# Altium PCB analog_ECG_PCB_v1.PcbDoc
Units mil, origin at the board's own origin, x right, y up, seen from the top; angles counter-clockwise.
Board outline 3049.21 x 2309.06 mil, 2 copper layers (Top Layer, Bottom Layer), stack 21 mil thick; 42 components, 34 nets, 130 pads, 0 vias.
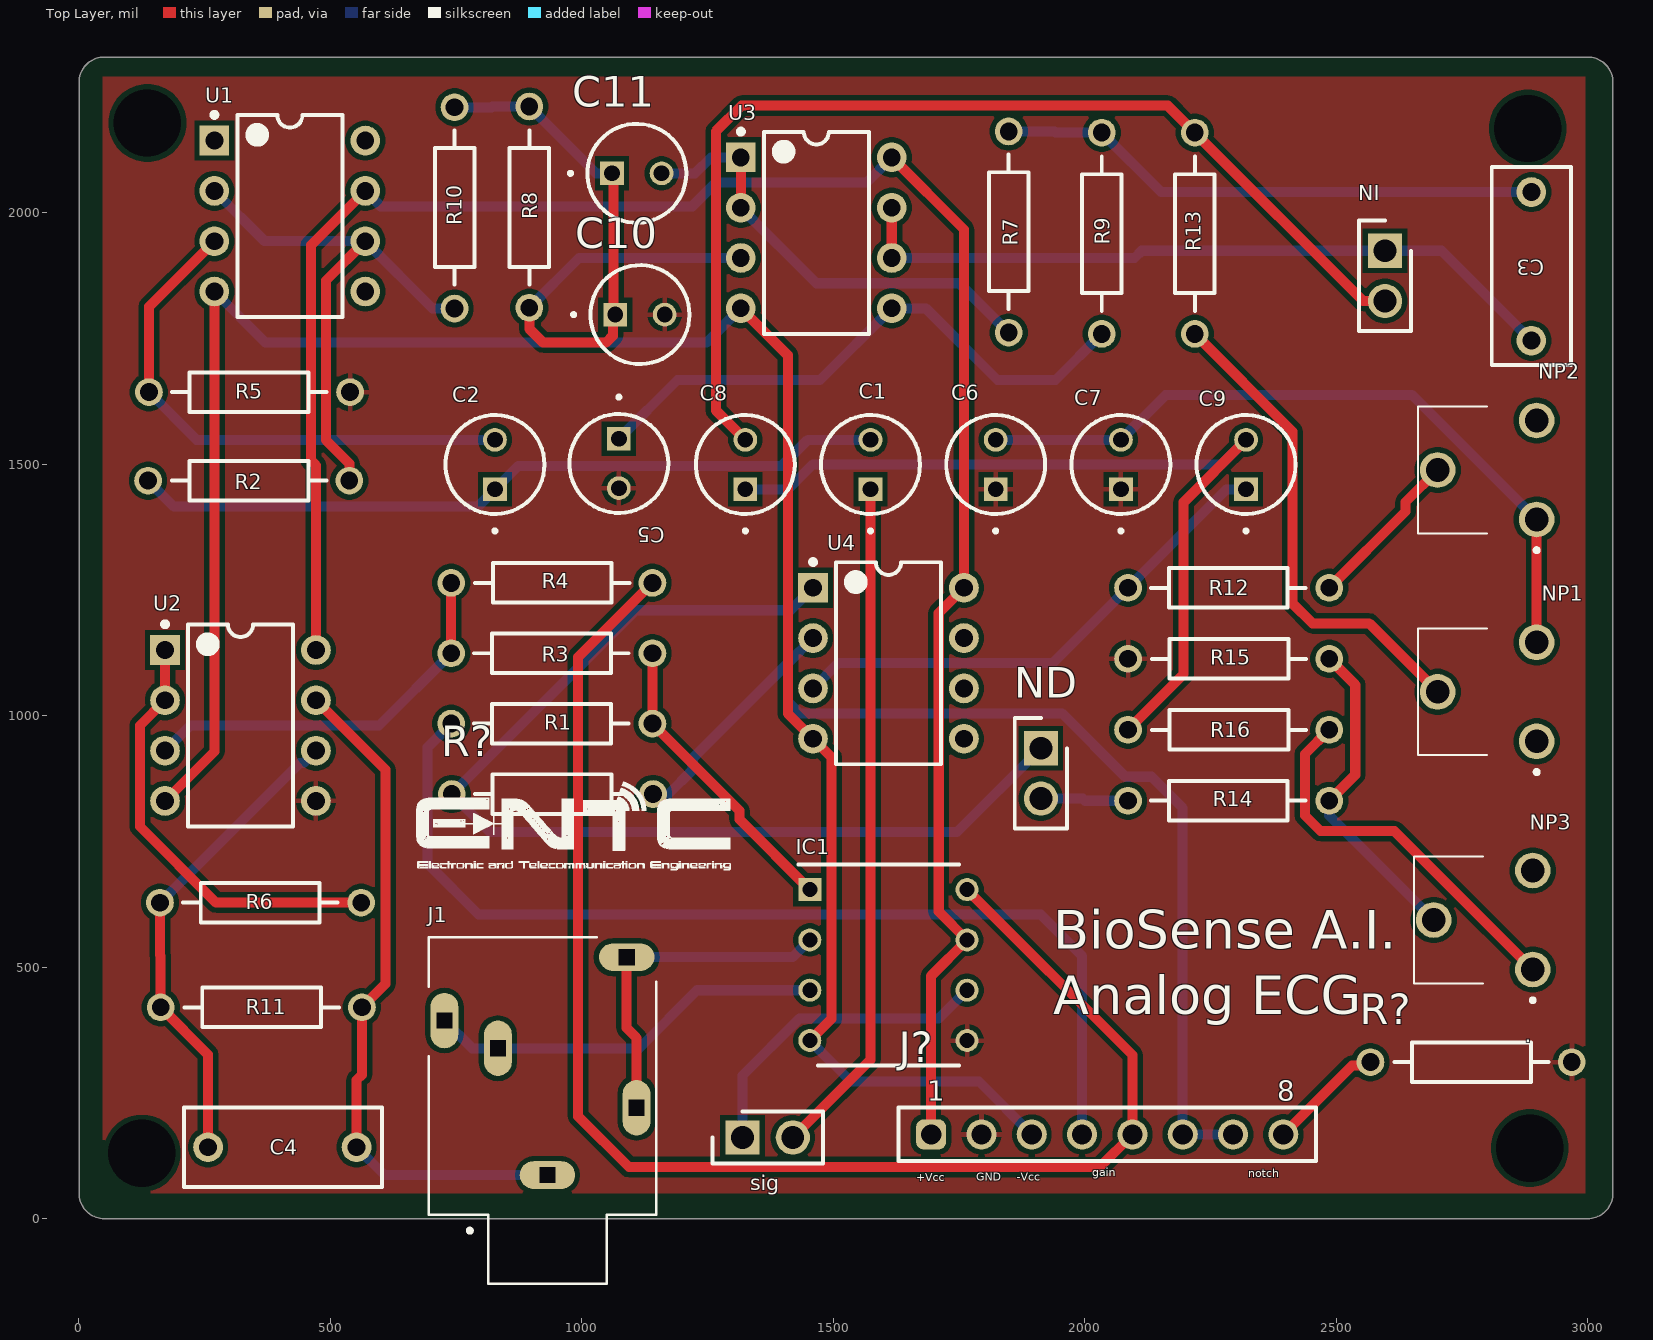
[diagram p0: Top Layer view]
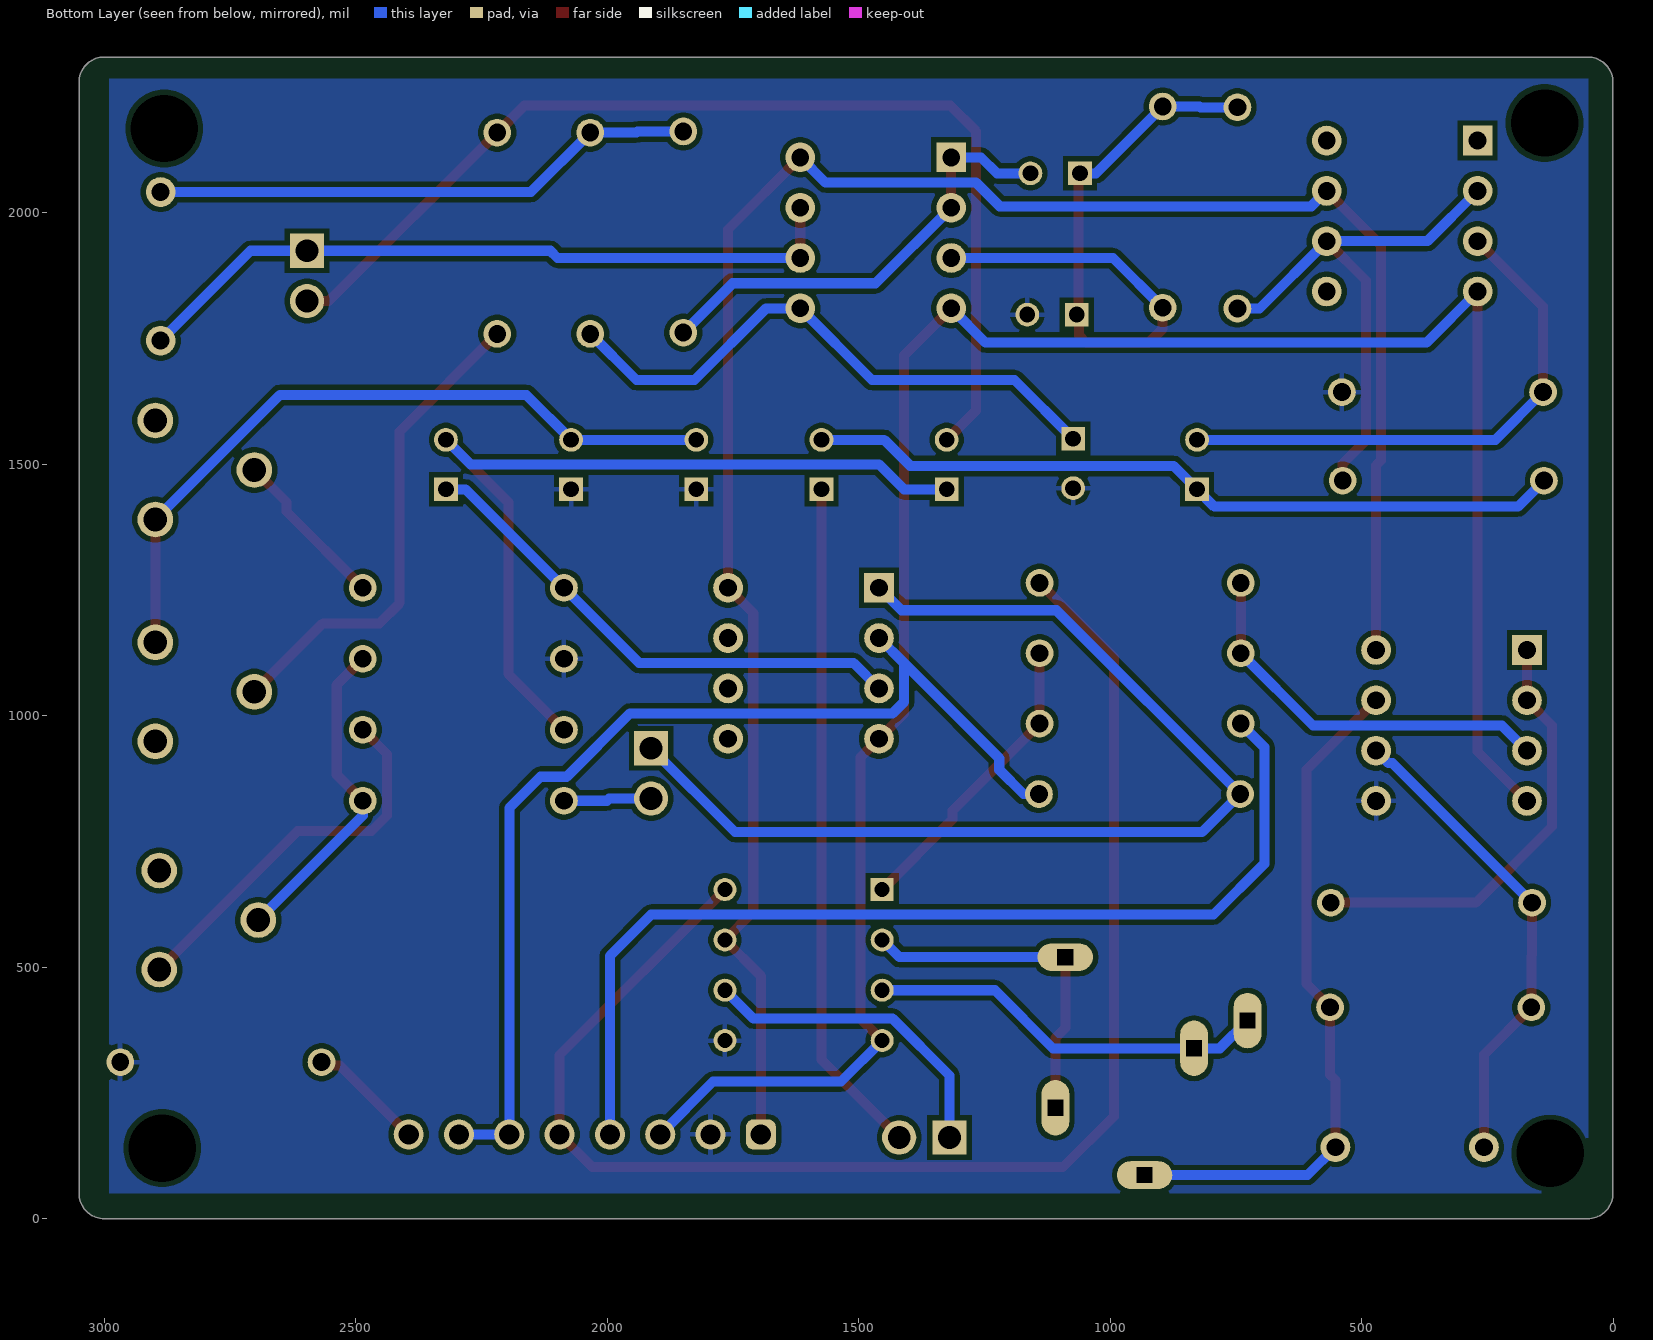
[diagram p1: Bottom Layer view, seen from below]
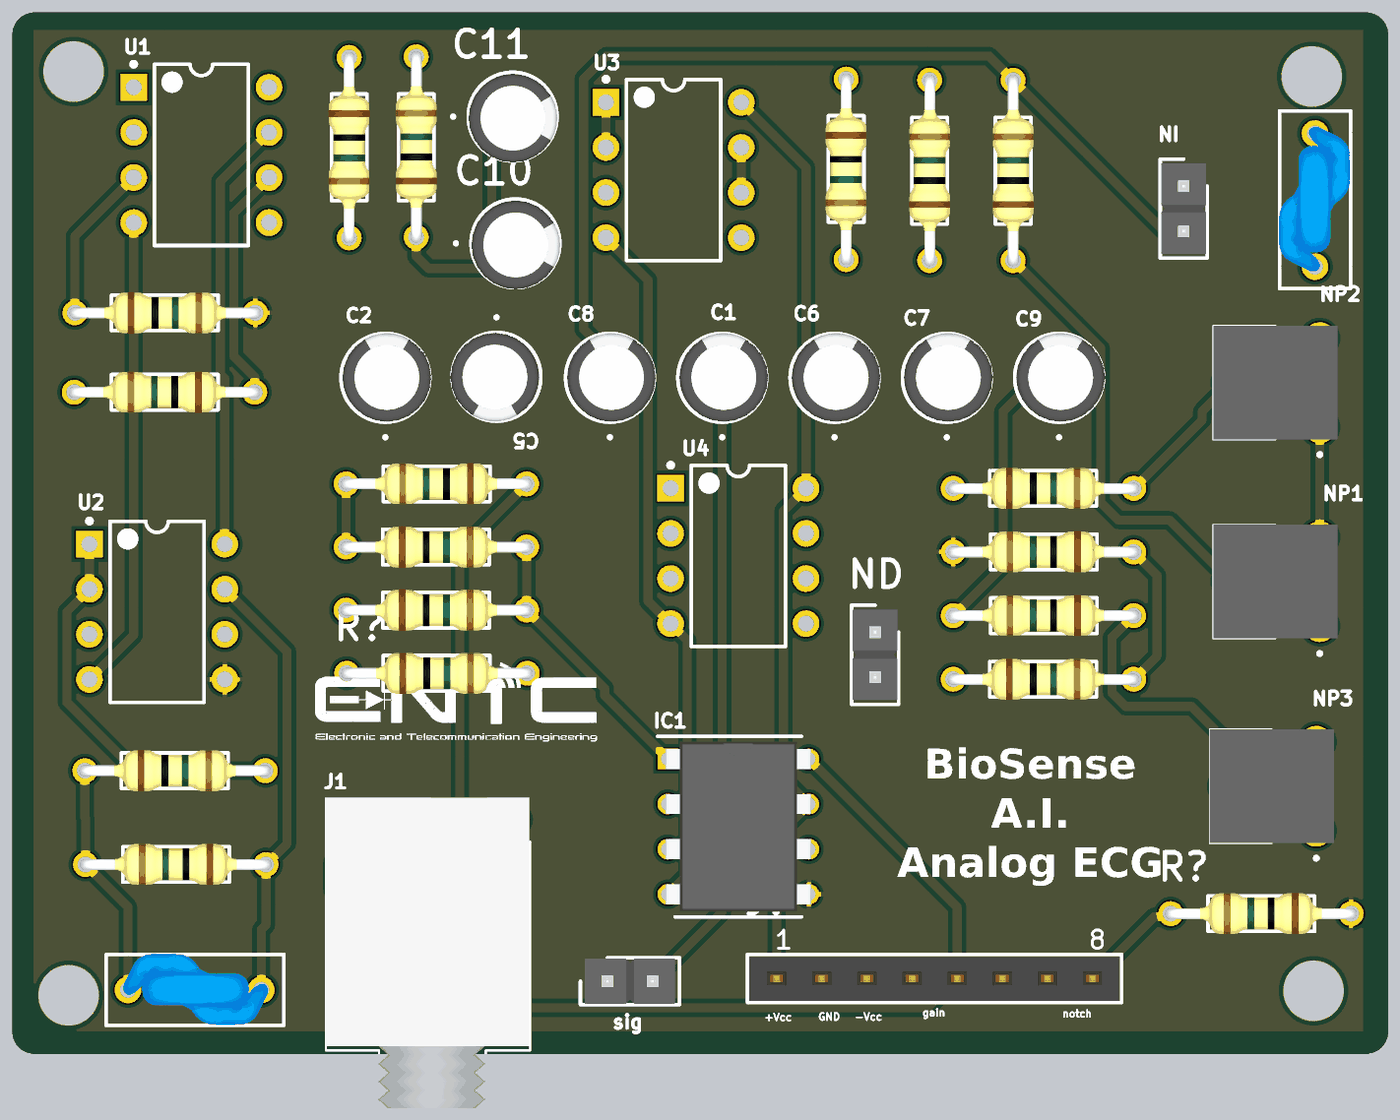
[diagram p2: 3D render of the assembled board from above, using the file's embedded part models]

## Layer stack, top to bottom
Top Solder: solder mask 0.4, Solder Resist, Dk 3.5
Top Layer: signal copper 1.4
Dielectric 2: prepreg 2.8, PP-006, Dk 4.1
Dielectric 1: dielectric 12.6, FR-4, Dk 4.8
Dielectric 3: prepreg 2.8, PP-006, Dk 4.1
Bottom Layer: signal copper 1.4
Bottom Solder: solder mask 0.4, Solder Resist, Dk 3.5

## Board outline
50.98,0 cw(c50.98,50) 0.98,50 0.98,2259.06 cw(c50.98,2259.06) 50.98,2309.06 3000.2,2309.06 cw(c3000.2,2259.06) 3050.2,2259.06 3050.2,50 cw(c3000.2,50) 3000.2,0

## Design rules (kind name [scope] priority, off if disabled: settings)
Clearance [All] p1: gap=10 ignorepadtopadclearanceinfootprint=FALSE except(0: Arc-Hole Track-Hole SMDPad-Hole THPad-Hole Via-Hole Fill-Hole Poly-Hole Region-Hole Text-Hole)
PolygonConnect [All] p1: connectstyle=Relief reliefconductorwidth=10 reliefentries=4 polygonreliefangle="90 Angle" airgapwidth=10
RoutingVias [All] p1: holewidth=28 width=50 viastyle="Through Hole" minholewidth=28 minwidth=50 maxholewidth=28 maxwidth=50
SolderMaskExpansion [All] p1: expansion=4 istentingtop=FALSE
Width [All] p1: maxlimit=30 minlimit=10 preferedwidth=20 minimp=50.000000 maximp=50.000000 favimp=50.000000
30 further rules are at their usual default settings.

## Components (designator, comment, footprint, x,y, rotation, side; value= is the part's Value field where it differs from the comment)
C1 "capacitor 15uF" Capacitor10uF 1574.31,1499.02 r90 top value=15uF
C2 "capacitor 15uF" Capacitor10uF 827.76,1499.02 r90 top value=15uF
C3 "0.68uF" "Capacitor - duplicate" 2888,1894 r270 top
C4 "0.68uF" "Capacitor - duplicate" 406,142 r180 top
C5 "capacitor 0.1uF" Capacitor10uF 1074,1501.21 r270 top value=0.1uF
C6 "0.1uF" Capacitor10uF 1823.16,1499.02 r90 top
C7 "0.1uF" Capacitor10uF 2072.01,1499.02 r90 top
C8 "capacitor 0.1uF" Capacitor10uF 1325.46,1499.02 r90 top value=0.1uF
C9 "capacitor 0.1uF" Capacitor10uF 2320.87,1499.02 r90 top value=0.1uF
C10 "0.1uF" Capacitor10uF 1116,1797 r0 top
C11 "0.1uF" Capacitor10uF 1109.79,2078 r0 top
IC1 "AD620BN" DIP794W56P254L959H533Q8N 1610,504 r0 top
J1 "3.5mm header" SWITCHCRAFT_35RAPC4BH3 922.24,214.57 r90 top
J? "61300811821" 61300811821 2044.94,167.32 r0 top
ND "2pinheader" HDRV2W66P0X254_1X2_508X254X874P 1913,935 r270 top
NI "2pinheader" HDRV2W66P0X254_1X2_508X254X874P 2597,1924 r270 top
NP1 "semifixedpots" VRRM065 2898.62,948.82 r90 top
NP2 "semifixedpots" VRRM065 2898.62,1389.76 r90 top
NP3 "semifixedpots" VRRM065 2890.78,495.08 r90 top
R1 "resistor 50ohm" "Axial 0.4" 939.96,983.94 r180 top value=10kR
R2 "resistor 8k" "Axial 0.4" 339,1467 r0 top value=10kR
R3 "resistor 33k" "Axial 0.4" 939.96,1123.89 r180 top value=10kR
R4 "resistor 33k" "Axial 0.4" 941.54,1263.78 r0 top value=10kR
R5 "R 16k" "Axial 0.4" 339,1643 r180 top value=10kR
R6 "R 12k" "Axial 0.4" 361,628 r180 top value=10kR
R7 "R 6.2k" "Axial 0.4" 1849,1962 r90 top value=10kR
R8 "R 15k" "Axial 0.4" 896,2010 r270 top value=10kR
R9 "R 6.2k" "Axial 0.4" 2034,1958 r270 top value=10kR
R10 "R 15k" "Axial 0.4" 747.52,2010 r90 top value=10kR
R11 "R 1M" "Axial 0.4" 364,420 r0 top value=10kR
R12 "R 32k" "Axial 0.4" 2285.43,1253.94 r180 top value=10kR
R13 "R 32k" "Axial 0.4" 2219,1958 r270 top value=10kR
R14 "resistor 1k" "Axial 0.4" 2285.43,830.71 r180 top value=10kR
R15 "resistor 20k" "Axial 0.4" 2287.01,1112.81 r0 top value=10kR
R16 "R 16k" "Axial 0.4" 2287.01,971.74 r0 top value=10kR
R? "R 100k" "Axial 0.4" 2769,311 r0 top value=10kR
R? "R 100k" "Axial 0.4" 941.21,844 r180 top value=10kR
sig "sig" HDRV2W66P0X254_1X2_508X254X874P 1319.88,161.22 r0 top
U1 "TL071CP" P0008A 420,1993 r0 top
U2 "TL072CP" P0008A 321.85,980.31 r0 top
U3 "TL072CP" P0008A 1466.54,1959.65 r0 top
U4 "TL072CP" P0008A 1610,1104 r0 top

## Footprints (in the part's own frame and the unit in brackets; to place one, negate y for a bottom-side part, rotate by r counter-clockwise, add the part's x,y. Pads: shape width x height; smd on the part's side, far side on the other; paste and mask are expansions set on the pad)
61300811821 [mm] "Socket Header, Pitch 2.54 mm, THT, Vertical, single row, 8p"
  rrect50% 1.52x1.52 hole 1.02: 1(-8.89,0)
  round 1.52 hole 1.02: 2(-6.35,0) 3(-3.81,0) 4(-1.27,0) 5(1.27,0) 6(3.81,0) 7(6.35,0) 8(8.89,0)
  silkscreen extent -10.54,-1.35 10.54,1.35, body extent -10.41,-1.25 10.41,1.25, height 8.55
"Axial 0.4" [mm]
  round 1.4 hole 0.9: 1(-5.1,0) 2(5.06,0)
  silkscreen extent -3.9,-1 3.9,1, body extent -5.4,-1.16 5.36,1.17, height 2.09
Capacitor10uF [mm]
  round 1.2 hole 0.8: N(1.25,0)
  rect 1.2x1.2 hole 0.8: P(-1.25,0)
  silkscreen extent -3.4,-2.5 2.5,2.5, body extent -2.47,-2.59 2.52,2.41, height 12
"Capacitor - duplicate" [mm]
  round 1.5 hole 0.9: 1(-3.725,0) 2(3.775,0)
  silkscreen extent -5,-2 5,2, body extent -4.1,-2.03 4.04,1.97, height 10.98
DIP794W56P254L959H533Q8N [mm]
  rect 1.16x1.16 hole 0.76: 1(-3.97,3.81)
  round 1.16 hole 0.76: 2(-3.97,1.27) 3(-3.97,-1.27) 4(-3.97,-3.81) 5(3.97,-3.81) 6(3.97,-1.27) 7(3.97,1.27) 8(3.97,3.81)
  silkscreen extent -4.55,-5.08 3.56,5.08, body extent -4.11,-4.79 4.11,4.79, height 5.33
HDRV2W66P0X254_1X2_508X254X874P [mm]
  rect 1.725x1.725 / inner round 1.725 / far side rect 1.725x1.725 hole 1.15: 1(0,0)
  round 1.725 hole 1.15: 2(2.54,0)
  silkscreen extent -1.52,-1.32 4.06,1.32, body extent -1.27,-1.27 3.81,1.27, height 8.74
P0008A [mm] "DIP, 8-Leads, Body 10.15x6.6mm, Pitch 2.54mm"
  rect 1.5x1.5 hole 0.9: 1(-3.81,3.81)
  round 1.5 hole 0.9: 2(-3.81,1.27) 3(-3.81,-1.27) 4(-3.81,-3.81) 5(3.81,-3.81) 6(3.81,-1.27) 7(3.81,1.27) 8(3.81,3.81)
  silkscreen extent -3.93,-5.1 2.65,5.23, body extent -3.95,-5.07 3.95,5.07, height 5.08
SWITCHCRAFT_35RAPC4BH3 [mm]
  oval 1.4x2.8 hole 0.8 square: 1(-3.25,-0.25) 4(7.75,-4.25)
  oval 2.8x1.4 hole 0.8 square: 2(4.55,4.95) 3(3.15,2.25) 5(0.15,-4.75)
  silkscreen extent -8.75,-5.75 8.75,5.75, body extent -8.51,-5.71 8.99,5.79, height 6.5
VRRM065 [mm]
  round 1.8 hole 1.2: 1(0,0) 2(2.5,5) 3(5,0)
  silkscreen extent -1.6,-0.05 5.7,6, body extent -0.7,-1 5.7,6, height 7.6

## Part data
C1 C2: library part "ECA-1HM100I (2)", "Aluminum Electrolytic Capacitor, Polarized, Aluminum (wet), 50V, 20% +Tol, 20% -Tol, 10uF, Through Hole Mount", Capacitor Type=Aluminium, Leakage Current=5uA, Manufacturer=Panasonic, Manufacturer Part Number=ECA-1HM100I, Max Operating Temperature=85°C, Min Operating Temperature=-40°C, Package Shape=Cylindrical, Package Style=RadialMeter, Rated DC Voltage (URdc)=50V, Ripple Current=65mA, Supplier Part Number=667-ECA-1HM100I, Tolerance  (fill in as +-)=20%, Category="Aluminum Electrolytic Capacitors", ComponentLink1Description=https://datasheet.ciiva.com:443/pdfs/VipMasterIC/IC/PANA/PANA-S-A0009891632/PANA-S-A0009891632-1.pdf?src-supplier=IHS+Markit, ComponentLink1URL=https://datasheet.ciiva.com:443/pdfs/VipMasterIC/IC/PANA/PANA-S-A0009891632/PANA-S-A0009891632-1.pdf?src-supplier=IHS+Markit, ComponentLink2Description=https://datasheet.ciiva.com/14608/70067785-14608821.pdf?src-supplier=Allied+Electronics, ComponentLink2URL=https://datasheet.ciiva.com/14608/70067785-14608821.pdf?src-supplier=Allied+Electronics, ComponentLink3Description=https://datasheet.ciiva.com/15197/getdatasheetpartid-238364-15197946.pdf?src-supplier=Verical, ComponentLink3URL=https://datasheet.ciiva.com/15197/getdatasheetpartid-238364-15197946.pdf?src-supplier=Verical, ComponentLink4Description=https://datasheet.ciiva.com/7794/1907780-7794379.pdf?src-supplier=Element14, ComponentLink4URL=https://datasheet.ciiva.com/7794/1907780-7794379.pdf?src-supplier=Element14, ComponentLink5Description=https://datasheet.ciiva.com/2984/aba0000ce12-2984335.pdf?src-supplier=Avnet, ComponentLink5URL=https://datasheet.ciiva.com/2984/aba0000ce12-2984335.pdf?src-supplier=Avnet, ComponentLink6Description=https://datasheet.ciiva.com/6121/aba0000ce12-6121535.pdf?src-supplier=Farnell, ComponentLink6URL=https://datasheet.ciiva.com/6121/aba0000ce12-6121535.pdf?src-supplier=Farnell, ComponentLink7Description=https://datasheet.ciiva.com/28677/aba0000ce12-28677830.pdf?src-supplier=Element14, ComponentLink7URL=https://datasheet.ciiva.com/28677/aba0000ce12-28677830.pdf?src-supplier=Element14, ComponentLink8Description=https://datasheet.ciiva.com/24234/aba0000ce12-465472-24234949.pdf?src-supplier=Mouser, ComponentLink8URL=https://datasheet.ciiva.com/24234/aba0000ce12-465472-24234949.pdf?src-supplier=Mouser, Diameter=5mm, Dielectric Material=Aluminium, JESD-609 Code=e3, Length=11mm, Mounting Technology="Through Hole", Packaging="Tape and Reel", Pins=2, Polarity=Polarized, Pricing="1=0.28, 10=0.193, 50=0.116, 100=0.098, 400=0.06, 1000=0.06, 2000=0.056, 4000=0.051, 8000=0.048, 10000=0.048 (USD)", Reach SVHC Compliant=Yes, RoHS=Yes, RoHS Compliant=Yes, Stock=35307, Supplier=Mouser, Tan Delta=0.12, Terminal Finish=Tin, Terminal Pitch=2.5mm, Termination=Wire, Tolerance (fill in as +-)=20%
C3 C4: library part DE21XSA220KN3AX02F, "Ceramic Capacitor, Ceramic, 10% +Tol, 10% -Tol, SL, -1000/+350ppm/Cel TC, 0.000022uF, Through Hole Mount", Manufacturer=Murata, Supplier Part Number=81-DE21XSA220KN3AX2F, Category="Ceramic Capacitors", Manufacturer Part Number=DE21XSA220KN3AX02F, Pricing="1=0.38, 10=0.252, 50=0.252, 100=0.151, 1000=0.095, 10000=0.09 (USD)", RoHS=Yes, Stock=156, Supplier=Mouser
C5 C6 C7 C8 C9 C10 C11: library part "ECA-1HM100I (2)_1", "Aluminum Electrolytic Capacitor, Polarized, Aluminum (wet), 50V, 20% +Tol, 20% -Tol, 10uF, Through Hole Mount", Capacitor Type=Aluminium, Leakage Current=5uA, Manufacturer=Panasonic, Manufacturer Part Number=ECA-1HM100I, Max Operating Temperature=85°C, Min Operating Temperature=-40°C, Package Shape=Cylindrical, Package Style=RadialMeter, Rated DC Voltage (URdc)=50V, Ripple Current=65mA, Supplier Part Number=667-ECA-1HM100I, Tolerance  (fill in as +-)=20%, Category="Aluminum Electrolytic Capacitors", ComponentLink1Description=https://datasheet.ciiva.com:443/pdfs/VipMasterIC/IC/PANA/PANA-S-A0009891632/PANA-S-A0009891632-1.pdf?src-supplier=IHS+Markit, ComponentLink1URL=https://datasheet.ciiva.com:443/pdfs/VipMasterIC/IC/PANA/PANA-S-A0009891632/PANA-S-A0009891632-1.pdf?src-supplier=IHS+Markit, ComponentLink2Description=https://datasheet.ciiva.com/14608/70067785-14608821.pdf?src-supplier=Allied+Electronics, ComponentLink2URL=https://datasheet.ciiva.com/14608/70067785-14608821.pdf?src-supplier=Allied+Electronics, ComponentLink3Description=https://datasheet.ciiva.com/15197/getdatasheetpartid-238364-15197946.pdf?src-supplier=Verical, ComponentLink3URL=https://datasheet.ciiva.com/15197/getdatasheetpartid-238364-15197946.pdf?src-supplier=Verical, ComponentLink4Description=https://datasheet.ciiva.com/7794/1907780-7794379.pdf?src-supplier=Element14, ComponentLink4URL=https://datasheet.ciiva.com/7794/1907780-7794379.pdf?src-supplier=Element14, ComponentLink5Description=https://datasheet.ciiva.com/2984/aba0000ce12-2984335.pdf?src-supplier=Avnet, ComponentLink5URL=https://datasheet.ciiva.com/2984/aba0000ce12-2984335.pdf?src-supplier=Avnet, ComponentLink6Description=https://datasheet.ciiva.com/6121/aba0000ce12-6121535.pdf?src-supplier=Farnell, ComponentLink6URL=https://datasheet.ciiva.com/6121/aba0000ce12-6121535.pdf?src-supplier=Farnell, ComponentLink7Description=https://datasheet.ciiva.com/28677/aba0000ce12-28677830.pdf?src-supplier=Element14, ComponentLink7URL=https://datasheet.ciiva.com/28677/aba0000ce12-28677830.pdf?src-supplier=Element14, ComponentLink8Description=https://datasheet.ciiva.com/24234/aba0000ce12-465472-24234949.pdf?src-supplier=Mouser, ComponentLink8URL=https://datasheet.ciiva.com/24234/aba0000ce12-465472-24234949.pdf?src-supplier=Mouser, Diameter=5mm, Dielectric Material=Aluminium, JESD-609 Code=e3, Length=11mm, Mounting Technology="Through Hole", Packaging="Tape and Reel", Pins=2, Polarity=Polarized, Pricing="1=0.28, 10=0.193, 50=0.116, 100=0.098, 400=0.06, 1000=0.06, 2000=0.056, 4000=0.051, 8000=0.048, 10000=0.048 (USD)", Reach SVHC Compliant=Yes, RoHS=Yes, RoHS Compliant=Yes, Stock=35307, Supplier=Mouser, Tan Delta=0.12, Terminal Finish=Tin, Terminal Pitch=2.5mm, Termination=Wire, Tolerance (fill in as +-)=20%
IC1: "Integrated Circuit", Manufacturer_Name="Rochester Electronics", Datasheet Link=https://www.analog.com/media/en/technical-documentation/data-sheets/ad620.pdf, Height=5.33mm, Manufacturer_Part_Number=AD620BN
J1: library part 35RAPC4BH3, "3.50mm (0.141\", 1/8\", Mini Plug) - Headphone Phone Jack Stereo (3 Conductor, TRS) Connector Solder", Package=None, Availability=Unavailable, MP=35RAPC4BH3, Price=None
J?: library part CMP-1502-01327-2, Contact Resistance=20mΩ, Current Rating=3A, Operating Supply Voltage=250V, Gender=Female, Lead Pitch=2.54mm, NexarPartId=61924723, Number of Pins=8, Orientation=Vertical, RoHS=Non-Compliant
R1: library part CF14JT10K0_1, "Fixed Resistor, Carbon Film, 0.25W, 10000ohm, 350V, 5% +/-Tol, -500,0ppm/Cel, Through Hole Mount", Manufacturer="Stackpole Electronics", Manufacturer Part Number=CF14JT10K0, Max Operating Temperature=155°C, Min Operating Temperature=-55°C, Package Diameter=2.3mm, Package Length=6mm, Package Shape=Tubular, Package Style=AxialMeter, Power=250mW, Rated Temperature=70°C, Resistor Type="FIXED RESISTOR", Supplier Part Number=CF14JT10K0TR-ND, Temperature Coefficient=500ppm/°C, Tolerance=5%, Working Voltage=350V, Category="Through-Hole Resistors", ComponentLink1Description=https://datasheet.ciiva.com:443/pdfs/VipMasterIC/IC/SEIE/SEIE-S-A0009883960/SEIE-S-A0009883960-1.pdf?src-supplier=IHS+Markit, ComponentLink1URL=https://datasheet.ciiva.com:443/pdfs/VipMasterIC/IC/SEIE/SEIE-S-A0009883960/SEIE-S-A0009883960-1.pdf?src-supplier=IHS+Markit, ComponentLink2Description=http://components.arrow.com/part/dataview/27619991S9848636N1174?src-supplier=Arrow+Electronics, ComponentLink2URL=http://components.arrow.com/part/dataview/27619991S9848636N1174?src-supplier=Arrow+Electronics, ComponentLink3Description=https://www.seielect.com/catalog/SEI-CF_CFM.pdf?src-supplier=Avnet, ComponentLink3URL=https://www.seielect.com/catalog/SEI-CF_CFM.pdf?src-supplier=Avnet, ComponentLink4Description=https://www.seielect.com/catalog/SEI-Packaging.pdf?src-supplier=Digi-Key, ComponentLink4URL=https://www.seielect.com/catalog/SEI-Packaging.pdf?src-supplier=Digi-Key, ComponentLink5Description=https://www.verical.com/server-webapp/html/getDatasheet?partID=367360&src-supplier=Verical, ComponentLink5URL=https://www.verical.com/server-webapp/html/getDatasheet?partID=367360&src-supplier=Verical, ComponentLink6Description=http://www.seielect.com/Catalog/SEI-CF_CFM.pdf?src-supplier=Future+Electronics, ComponentLink6URL=http://www.seielect.com/Catalog/SEI-CF_CFM.pdf?src-supplier=Future+Electronics, Construction=Tubular, JESD-609 Code=e3, Lead Diameter=0.55mm, Lead Length=28mm, Mounting Technology="Through Hole", Packaging="Tape and Reel", Pins=2, Pricing="5000=0.00729, 10000=0.00633, 25000=0.00557, 50000=0.0051, 125000=0.005 (USD)", Reach SVHC Compliant=Yes, RoHS=Yes, RoHS Compliant=Yes, Supplier=Digi-Key, Technology="CARBON FILM", Terminal Finish=Tin, Termination=Wire
R2: library part CF14JT10K01208, "Fixed Resistor, Carbon Film, 0.25W, 10000ohm, 350V, 5% +/-Tol, -500,0ppm/Cel, Through Hole Mount", Manufacturer="Stackpole Electronics", Manufacturer Part Number=CF14JT10K0, Max Operating Temperature=155°C, Min Operating Temperature=-55°C, Package Diameter=2.3mm, Package Length=6mm, Package Shape=Tubular, Package Style=AxialMeter, Power=250mW, Rated Temperature=70°C, Resistor Type="FIXED RESISTOR", Supplier Part Number=CF14JT10K0TR-ND, Temperature Coefficient=500ppm/°C, Tolerance=5%, Working Voltage=350V, Category="Through-Hole Resistors", ComponentLink1Description=https://datasheet.ciiva.com:443/pdfs/VipMasterIC/IC/SEIE/SEIE-S-A0009883960/SEIE-S-A0009883960-1.pdf?src-supplier=IHS+Markit, ComponentLink1URL=https://datasheet.ciiva.com:443/pdfs/VipMasterIC/IC/SEIE/SEIE-S-A0009883960/SEIE-S-A0009883960-1.pdf?src-supplier=IHS+Markit, ComponentLink2Description=http://components.arrow.com/part/dataview/27619991S9848636N1174?src-supplier=Arrow+Electronics, ComponentLink2URL=http://components.arrow.com/part/dataview/27619991S9848636N1174?src-supplier=Arrow+Electronics, ComponentLink3Description=https://www.seielect.com/catalog/SEI-CF_CFM.pdf?src-supplier=Avnet, ComponentLink3URL=https://www.seielect.com/catalog/SEI-CF_CFM.pdf?src-supplier=Avnet, ComponentLink4Description=https://www.seielect.com/catalog/SEI-Packaging.pdf?src-supplier=Digi-Key, ComponentLink4URL=https://www.seielect.com/catalog/SEI-Packaging.pdf?src-supplier=Digi-Key, ComponentLink5Description=https://www.verical.com/server-webapp/html/getDatasheet?partID=367360&src-supplier=Verical, ComponentLink5URL=https://www.verical.com/server-webapp/html/getDatasheet?partID=367360&src-supplier=Verical, ComponentLink6Description=http://www.seielect.com/Catalog/SEI-CF_CFM.pdf?src-supplier=Future+Electronics, ComponentLink6URL=http://www.seielect.com/Catalog/SEI-CF_CFM.pdf?src-supplier=Future+Electronics, Construction=Tubular, JESD-609 Code=e3, Lead Diameter=0.55mm, Lead Length=28mm, Mounting Technology="Through Hole", Packaging="Tape and Reel", Pins=2, Pricing="5000=0.00729, 10000=0.00633, 25000=0.00557, 50000=0.0051, 125000=0.005 (USD)", Reach SVHC Compliant=Yes, RoHS=Yes, RoHS Compliant=Yes, Supplier=Digi-Key, Technology="CARBON FILM", Terminal Finish=Tin, Termination=Wire
R3 R4: library part CF14JT10K0, "Fixed Resistor, Carbon Film, 0.25W, 10000ohm, 350V, 5% +/-Tol, -500,0ppm/Cel, Through Hole Mount", Manufacturer="Stackpole Electronics", Max Operating Temperature=155°C, Min Operating Temperature=-55°C, Package Diameter=2.3mm, Package Length=6mm, Package Shape=Tubular, Package Style=AxialMeter, Power=250mW, Rated Temperature=70°C, Resistor Type="FIXED RESISTOR", Supplier Part Number=CF14JT10K0TR-ND, Temperature Coefficient=500ppm/°C, Tolerance=5%, Working Voltage=350V, Category="Through-Hole Resistors", ComponentLink1Description=https://datasheet.ciiva.com:443/pdfs/VipMasterIC/IC/SEIE/SEIE-S-A0009883960/SEIE-S-A0009883960-1.pdf?src-supplier=IHS+Markit, ComponentLink1URL=https://datasheet.ciiva.com:443/pdfs/VipMasterIC/IC/SEIE/SEIE-S-A0009883960/SEIE-S-A0009883960-1.pdf?src-supplier=IHS+Markit, ComponentLink2Description=http://components.arrow.com/part/dataview/27619991S9848636N1174?src-supplier=Arrow+Electronics, ComponentLink2URL=http://components.arrow.com/part/dataview/27619991S9848636N1174?src-supplier=Arrow+Electronics, ComponentLink3Description=https://www.seielect.com/catalog/SEI-CF_CFM.pdf?src-supplier=Avnet, ComponentLink3URL=https://www.seielect.com/catalog/SEI-CF_CFM.pdf?src-supplier=Avnet, ComponentLink4Description=https://www.seielect.com/catalog/SEI-Packaging.pdf?src-supplier=Digi-Key, ComponentLink4URL=https://www.seielect.com/catalog/SEI-Packaging.pdf?src-supplier=Digi-Key, ComponentLink5Description=https://www.verical.com/server-webapp/html/getDatasheet?partID=367360&src-supplier=Verical, ComponentLink5URL=https://www.verical.com/server-webapp/html/getDatasheet?partID=367360&src-supplier=Verical, ComponentLink6Description=http://www.seielect.com/Catalog/SEI-CF_CFM.pdf?src-supplier=Future+Electronics, ComponentLink6URL=http://www.seielect.com/Catalog/SEI-CF_CFM.pdf?src-supplier=Future+Electronics, Construction=Tubular, JESD-609 Code=e3, Lead Diameter=0.55mm, Lead Length=28mm, Manufacturer Part Number=CF14JT10K0, Mounting Technology="Through Hole", Packaging="Tape and Reel", Pins=2, Pricing="5000=0.00729, 10000=0.00633, 25000=0.00557, 50000=0.0051, 125000=0.005 (USD)", Reach SVHC Compliant=Yes, RoHS=Yes, RoHS Compliant=Yes, Supplier=Digi-Key, Technology="CARBON FILM", Terminal Finish=Tin, Termination=Wire
R5 R16: library part CF14JT10K016, "Fixed Resistor, Carbon Film, 0.25W, 10000ohm, 350V, 5% +/-Tol, -500,0ppm/Cel, Through Hole Mount", Manufacturer="Stackpole Electronics", Manufacturer Part Number=CF14JT10K0, Max Operating Temperature=155°C, Min Operating Temperature=-55°C, Package Diameter=2.3mm, Package Length=6mm, Package Shape=Tubular, Package Style=AxialMeter, Power=250mW, Rated Temperature=70°C, Resistor Type="FIXED RESISTOR", Supplier Part Number=CF14JT10K0TR-ND, Temperature Coefficient=500ppm/°C, Tolerance=5%, Working Voltage=350V, Category="Through-Hole Resistors", ComponentLink1Description=https://datasheet.ciiva.com:443/pdfs/VipMasterIC/IC/SEIE/SEIE-S-A0009883960/SEIE-S-A0009883960-1.pdf?src-supplier=IHS+Markit, ComponentLink1URL=https://datasheet.ciiva.com:443/pdfs/VipMasterIC/IC/SEIE/SEIE-S-A0009883960/SEIE-S-A0009883960-1.pdf?src-supplier=IHS+Markit, ComponentLink2Description=http://components.arrow.com/part/dataview/27619991S9848636N1174?src-supplier=Arrow+Electronics, ComponentLink2URL=http://components.arrow.com/part/dataview/27619991S9848636N1174?src-supplier=Arrow+Electronics, ComponentLink3Description=https://www.seielect.com/catalog/SEI-CF_CFM.pdf?src-supplier=Avnet, ComponentLink3URL=https://www.seielect.com/catalog/SEI-CF_CFM.pdf?src-supplier=Avnet, ComponentLink4Description=https://www.seielect.com/catalog/SEI-Packaging.pdf?src-supplier=Digi-Key, ComponentLink4URL=https://www.seielect.com/catalog/SEI-Packaging.pdf?src-supplier=Digi-Key, ComponentLink5Description=https://www.verical.com/server-webapp/html/getDatasheet?partID=367360&src-supplier=Verical, ComponentLink5URL=https://www.verical.com/server-webapp/html/getDatasheet?partID=367360&src-supplier=Verical, ComponentLink6Description=http://www.seielect.com/Catalog/SEI-CF_CFM.pdf?src-supplier=Future+Electronics, ComponentLink6URL=http://www.seielect.com/Catalog/SEI-CF_CFM.pdf?src-supplier=Future+Electronics, Construction=Tubular, JESD-609 Code=e3, Lead Diameter=0.55mm, Lead Length=28mm, Mounting Technology="Through Hole", Packaging="Tape and Reel", Pins=2, Pricing="5000=0.00729, 10000=0.00633, 25000=0.00557, 50000=0.0051, 125000=0.005 (USD)", Reach SVHC Compliant=Yes, RoHS=Yes, RoHS Compliant=Yes, Supplier=Digi-Key, Technology="CARBON FILM", Terminal Finish=Tin, Termination=Wire
R6: library part CF14JT10K0_1_1, "Fixed Resistor, Carbon Film, 0.25W, 10000ohm, 350V, 5% +/-Tol, -500,0ppm/Cel, Through Hole Mount", Manufacturer="Stackpole Electronics", Manufacturer Part Number=CF14JT10K0, Max Operating Temperature=155°C, Min Operating Temperature=-55°C, Package Diameter=2.3mm, Package Length=6mm, Package Shape=Tubular, Package Style=AxialMeter, Power=250mW, Rated Temperature=70°C, Resistor Type="FIXED RESISTOR", Supplier Part Number=CF14JT10K0TR-ND, Temperature Coefficient=500ppm/°C, Tolerance=5%, Working Voltage=350V, Category="Through-Hole Resistors", ComponentLink1Description=https://datasheet.ciiva.com:443/pdfs/VipMasterIC/IC/SEIE/SEIE-S-A0009883960/SEIE-S-A0009883960-1.pdf?src-supplier=IHS+Markit, ComponentLink1URL=https://datasheet.ciiva.com:443/pdfs/VipMasterIC/IC/SEIE/SEIE-S-A0009883960/SEIE-S-A0009883960-1.pdf?src-supplier=IHS+Markit, ComponentLink2Description=http://components.arrow.com/part/dataview/27619991S9848636N1174?src-supplier=Arrow+Electronics, ComponentLink2URL=http://components.arrow.com/part/dataview/27619991S9848636N1174?src-supplier=Arrow+Electronics, ComponentLink3Description=https://www.seielect.com/catalog/SEI-CF_CFM.pdf?src-supplier=Avnet, ComponentLink3URL=https://www.seielect.com/catalog/SEI-CF_CFM.pdf?src-supplier=Avnet, ComponentLink4Description=https://www.seielect.com/catalog/SEI-Packaging.pdf?src-supplier=Digi-Key, ComponentLink4URL=https://www.seielect.com/catalog/SEI-Packaging.pdf?src-supplier=Digi-Key, ComponentLink5Description=https://www.verical.com/server-webapp/html/getDatasheet?partID=367360&src-supplier=Verical, ComponentLink5URL=https://www.verical.com/server-webapp/html/getDatasheet?partID=367360&src-supplier=Verical, ComponentLink6Description=http://www.seielect.com/Catalog/SEI-CF_CFM.pdf?src-supplier=Future+Electronics, ComponentLink6URL=http://www.seielect.com/Catalog/SEI-CF_CFM.pdf?src-supplier=Future+Electronics, Construction=Tubular, JESD-609 Code=e3, Lead Diameter=0.55mm, Lead Length=28mm, Mounting Technology="Through Hole", Packaging="Tape and Reel", Pins=2, Pricing="5000=0.00729, 10000=0.00633, 25000=0.00557, 50000=0.0051, 125000=0.005 (USD)", Reach SVHC Compliant=Yes, RoHS=Yes, RoHS Compliant=Yes, Supplier=Digi-Key, Technology="CARBON FILM", Terminal Finish=Tin, Termination=Wire
R7 R9: library part CF14JT10K0_1_1_1_1, "Fixed Resistor, Carbon Film, 0.25W, 10000ohm, 350V, 5% +/-Tol, -500,0ppm/Cel, Through Hole Mount", Manufacturer="Stackpole Electronics", Manufacturer Part Number=CF14JT10K0, Max Operating Temperature=155°C, Min Operating Temperature=-55°C, Package Diameter=2.3mm, Package Length=6mm, Package Shape=Tubular, Package Style=AxialMeter, Power=250mW, Rated Temperature=70°C, Resistor Type="FIXED RESISTOR", Supplier Part Number=CF14JT10K0TR-ND, Temperature Coefficient=500ppm/°C, Tolerance=5%, Working Voltage=350V, Category="Through-Hole Resistors", ComponentLink1Description=https://datasheet.ciiva.com:443/pdfs/VipMasterIC/IC/SEIE/SEIE-S-A0009883960/SEIE-S-A0009883960-1.pdf?src-supplier=IHS+Markit, ComponentLink1URL=https://datasheet.ciiva.com:443/pdfs/VipMasterIC/IC/SEIE/SEIE-S-A0009883960/SEIE-S-A0009883960-1.pdf?src-supplier=IHS+Markit, ComponentLink2Description=http://components.arrow.com/part/dataview/27619991S9848636N1174?src-supplier=Arrow+Electronics, ComponentLink2URL=http://components.arrow.com/part/dataview/27619991S9848636N1174?src-supplier=Arrow+Electronics, ComponentLink3Description=https://www.seielect.com/catalog/SEI-CF_CFM.pdf?src-supplier=Avnet, ComponentLink3URL=https://www.seielect.com/catalog/SEI-CF_CFM.pdf?src-supplier=Avnet, ComponentLink4Description=https://www.seielect.com/catalog/SEI-Packaging.pdf?src-supplier=Digi-Key, ComponentLink4URL=https://www.seielect.com/catalog/SEI-Packaging.pdf?src-supplier=Digi-Key, ComponentLink5Description=https://www.verical.com/server-webapp/html/getDatasheet?partID=367360&src-supplier=Verical, ComponentLink5URL=https://www.verical.com/server-webapp/html/getDatasheet?partID=367360&src-supplier=Verical, ComponentLink6Description=http://www.seielect.com/Catalog/SEI-CF_CFM.pdf?src-supplier=Future+Electronics, ComponentLink6URL=http://www.seielect.com/Catalog/SEI-CF_CFM.pdf?src-supplier=Future+Electronics, Construction=Tubular, JESD-609 Code=e3, Lead Diameter=0.55mm, Lead Length=28mm, Mounting Technology="Through Hole", Packaging="Tape and Reel", Pins=2, Pricing="5000=0.00729, 10000=0.00633, 25000=0.00557, 50000=0.0051, 125000=0.005 (USD)", Reach SVHC Compliant=Yes, RoHS=Yes, RoHS Compliant=Yes, Supplier=Digi-Key, Technology="CARBON FILM", Terminal Finish=Tin, Termination=Wire
R8 R10: library part CF14JT10K0_1_1_1_1_1, "Fixed Resistor, Carbon Film, 0.25W, 10000ohm, 350V, 5% +/-Tol, -500,0ppm/Cel, Through Hole Mount", Manufacturer="Stackpole Electronics", Manufacturer Part Number=CF14JT10K0, Max Operating Temperature=155°C, Min Operating Temperature=-55°C, Package Diameter=2.3mm, Package Length=6mm, Package Shape=Tubular, Package Style=AxialMeter, Power=250mW, Rated Temperature=70°C, Resistor Type="FIXED RESISTOR", Supplier Part Number=CF14JT10K0TR-ND, Temperature Coefficient=500ppm/°C, Tolerance=5%, Working Voltage=350V, Category="Through-Hole Resistors", ComponentLink1Description=https://datasheet.ciiva.com:443/pdfs/VipMasterIC/IC/SEIE/SEIE-S-A0009883960/SEIE-S-A0009883960-1.pdf?src-supplier=IHS+Markit, ComponentLink1URL=https://datasheet.ciiva.com:443/pdfs/VipMasterIC/IC/SEIE/SEIE-S-A0009883960/SEIE-S-A0009883960-1.pdf?src-supplier=IHS+Markit, ComponentLink2Description=http://components.arrow.com/part/dataview/27619991S9848636N1174?src-supplier=Arrow+Electronics, ComponentLink2URL=http://components.arrow.com/part/dataview/27619991S9848636N1174?src-supplier=Arrow+Electronics, ComponentLink3Description=https://www.seielect.com/catalog/SEI-CF_CFM.pdf?src-supplier=Avnet, ComponentLink3URL=https://www.seielect.com/catalog/SEI-CF_CFM.pdf?src-supplier=Avnet, ComponentLink4Description=https://www.seielect.com/catalog/SEI-Packaging.pdf?src-supplier=Digi-Key, ComponentLink4URL=https://www.seielect.com/catalog/SEI-Packaging.pdf?src-supplier=Digi-Key, ComponentLink5Description=https://www.verical.com/server-webapp/html/getDatasheet?partID=367360&src-supplier=Verical, ComponentLink5URL=https://www.verical.com/server-webapp/html/getDatasheet?partID=367360&src-supplier=Verical, ComponentLink6Description=http://www.seielect.com/Catalog/SEI-CF_CFM.pdf?src-supplier=Future+Electronics, ComponentLink6URL=http://www.seielect.com/Catalog/SEI-CF_CFM.pdf?src-supplier=Future+Electronics, Construction=Tubular, JESD-609 Code=e3, Lead Diameter=0.55mm, Lead Length=28mm, Mounting Technology="Through Hole", Packaging="Tape and Reel", Pins=2, Pricing="5000=0.00729, 10000=0.00633, 25000=0.00557, 50000=0.0051, 125000=0.005 (USD)", Reach SVHC Compliant=Yes, RoHS=Yes, RoHS Compliant=Yes, Supplier=Digi-Key, Technology="CARBON FILM", Terminal Finish=Tin, Termination=Wire
R11 R? R?: library part CF14JT10K0_1_1_1, "Fixed Resistor, Carbon Film, 0.25W, 10000ohm, 350V, 5% +/-Tol, -500,0ppm/Cel, Through Hole Mount", Manufacturer="Stackpole Electronics", Manufacturer Part Number=CF14JT10K0, Max Operating Temperature=155°C, Min Operating Temperature=-55°C, Package Diameter=2.3mm, Package Length=6mm, Package Shape=Tubular, Package Style=AxialMeter, Power=250mW, Rated Temperature=70°C, Resistor Type="FIXED RESISTOR", Supplier Part Number=CF14JT10K0TR-ND, Temperature Coefficient=500ppm/°C, Tolerance=5%, Working Voltage=350V, Category="Through-Hole Resistors", ComponentLink1Description=https://datasheet.ciiva.com:443/pdfs/VipMasterIC/IC/SEIE/SEIE-S-A0009883960/SEIE-S-A0009883960-1.pdf?src-supplier=IHS+Markit, ComponentLink1URL=https://datasheet.ciiva.com:443/pdfs/VipMasterIC/IC/SEIE/SEIE-S-A0009883960/SEIE-S-A0009883960-1.pdf?src-supplier=IHS+Markit, ComponentLink2Description=http://components.arrow.com/part/dataview/27619991S9848636N1174?src-supplier=Arrow+Electronics, ComponentLink2URL=http://components.arrow.com/part/dataview/27619991S9848636N1174?src-supplier=Arrow+Electronics, ComponentLink3Description=https://www.seielect.com/catalog/SEI-CF_CFM.pdf?src-supplier=Avnet, ComponentLink3URL=https://www.seielect.com/catalog/SEI-CF_CFM.pdf?src-supplier=Avnet, ComponentLink4Description=https://www.seielect.com/catalog/SEI-Packaging.pdf?src-supplier=Digi-Key, ComponentLink4URL=https://www.seielect.com/catalog/SEI-Packaging.pdf?src-supplier=Digi-Key, ComponentLink5Description=https://www.verical.com/server-webapp/html/getDatasheet?partID=367360&src-supplier=Verical, ComponentLink5URL=https://www.verical.com/server-webapp/html/getDatasheet?partID=367360&src-supplier=Verical, ComponentLink6Description=http://www.seielect.com/Catalog/SEI-CF_CFM.pdf?src-supplier=Future+Electronics, ComponentLink6URL=http://www.seielect.com/Catalog/SEI-CF_CFM.pdf?src-supplier=Future+Electronics, Construction=Tubular, JESD-609 Code=e3, Lead Diameter=0.55mm, Lead Length=28mm, Mounting Technology="Through Hole", Packaging="Tape and Reel", Pins=2, Pricing="5000=0.00729, 10000=0.00633, 25000=0.00557, 50000=0.0051, 125000=0.005 (USD)", Reach SVHC Compliant=Yes, RoHS=Yes, RoHS Compliant=Yes, Supplier=Digi-Key, Technology="CARBON FILM", Terminal Finish=Tin, Termination=Wire
R12 R13: library part CF14JT10K032, "Fixed Resistor, Carbon Film, 0.25W, 10000ohm, 350V, 5% +/-Tol, -500,0ppm/Cel, Through Hole Mount", Manufacturer="Stackpole Electronics", Manufacturer Part Number=CF14JT10K0, Max Operating Temperature=155°C, Min Operating Temperature=-55°C, Package Diameter=2.3mm, Package Length=6mm, Package Shape=Tubular, Package Style=AxialMeter, Power=250mW, Rated Temperature=70°C, Resistor Type="FIXED RESISTOR", Supplier Part Number=CF14JT10K0TR-ND, Temperature Coefficient=500ppm/°C, Tolerance=5%, Working Voltage=350V, Category="Through-Hole Resistors", ComponentLink1Description=https://datasheet.ciiva.com:443/pdfs/VipMasterIC/IC/SEIE/SEIE-S-A0009883960/SEIE-S-A0009883960-1.pdf?src-supplier=IHS+Markit, ComponentLink1URL=https://datasheet.ciiva.com:443/pdfs/VipMasterIC/IC/SEIE/SEIE-S-A0009883960/SEIE-S-A0009883960-1.pdf?src-supplier=IHS+Markit, ComponentLink2Description=http://components.arrow.com/part/dataview/27619991S9848636N1174?src-supplier=Arrow+Electronics, ComponentLink2URL=http://components.arrow.com/part/dataview/27619991S9848636N1174?src-supplier=Arrow+Electronics, ComponentLink3Description=https://www.seielect.com/catalog/SEI-CF_CFM.pdf?src-supplier=Avnet, ComponentLink3URL=https://www.seielect.com/catalog/SEI-CF_CFM.pdf?src-supplier=Avnet, ComponentLink4Description=https://www.seielect.com/catalog/SEI-Packaging.pdf?src-supplier=Digi-Key, ComponentLink4URL=https://www.seielect.com/catalog/SEI-Packaging.pdf?src-supplier=Digi-Key, ComponentLink5Description=https://www.verical.com/server-webapp/html/getDatasheet?partID=367360&src-supplier=Verical, ComponentLink5URL=https://www.verical.com/server-webapp/html/getDatasheet?partID=367360&src-supplier=Verical, ComponentLink6Description=http://www.seielect.com/Catalog/SEI-CF_CFM.pdf?src-supplier=Future+Electronics, ComponentLink6URL=http://www.seielect.com/Catalog/SEI-CF_CFM.pdf?src-supplier=Future+Electronics, Construction=Tubular, JESD-609 Code=e3, Lead Diameter=0.55mm, Lead Length=28mm, Mounting Technology="Through Hole", Packaging="Tape and Reel", Pins=2, Pricing="5000=0.00729, 10000=0.00633, 25000=0.00557, 50000=0.0051, 125000=0.005 (USD)", Reach SVHC Compliant=Yes, RoHS=Yes, RoHS Compliant=Yes, Supplier=Digi-Key, Technology="CARBON FILM", Terminal Finish=Tin, Termination=Wire
R14: library part CF14JT10K01, "Fixed Resistor, Carbon Film, 0.25W, 10000ohm, 350V, 5% +/-Tol, -500,0ppm/Cel, Through Hole Mount", Manufacturer="Stackpole Electronics", Manufacturer Part Number=CF14JT10K0, Max Operating Temperature=155°C, Min Operating Temperature=-55°C, Package Diameter=2.3mm, Package Length=6mm, Package Shape=Tubular, Package Style=AxialMeter, Power=250mW, Rated Temperature=70°C, Resistor Type="FIXED RESISTOR", Supplier Part Number=CF14JT10K0TR-ND, Temperature Coefficient=500ppm/°C, Tolerance=5%, Working Voltage=350V, Category="Through-Hole Resistors", ComponentLink1Description=https://datasheet.ciiva.com:443/pdfs/VipMasterIC/IC/SEIE/SEIE-S-A0009883960/SEIE-S-A0009883960-1.pdf?src-supplier=IHS+Markit, ComponentLink1URL=https://datasheet.ciiva.com:443/pdfs/VipMasterIC/IC/SEIE/SEIE-S-A0009883960/SEIE-S-A0009883960-1.pdf?src-supplier=IHS+Markit, ComponentLink2Description=http://components.arrow.com/part/dataview/27619991S9848636N1174?src-supplier=Arrow+Electronics, ComponentLink2URL=http://components.arrow.com/part/dataview/27619991S9848636N1174?src-supplier=Arrow+Electronics, ComponentLink3Description=https://www.seielect.com/catalog/SEI-CF_CFM.pdf?src-supplier=Avnet, ComponentLink3URL=https://www.seielect.com/catalog/SEI-CF_CFM.pdf?src-supplier=Avnet, ComponentLink4Description=https://www.seielect.com/catalog/SEI-Packaging.pdf?src-supplier=Digi-Key, ComponentLink4URL=https://www.seielect.com/catalog/SEI-Packaging.pdf?src-supplier=Digi-Key, ComponentLink5Description=https://www.verical.com/server-webapp/html/getDatasheet?partID=367360&src-supplier=Verical, ComponentLink5URL=https://www.verical.com/server-webapp/html/getDatasheet?partID=367360&src-supplier=Verical, ComponentLink6Description=http://www.seielect.com/Catalog/SEI-CF_CFM.pdf?src-supplier=Future+Electronics, ComponentLink6URL=http://www.seielect.com/Catalog/SEI-CF_CFM.pdf?src-supplier=Future+Electronics, Construction=Tubular, JESD-609 Code=e3, Lead Diameter=0.55mm, Lead Length=28mm, Mounting Technology="Through Hole", Packaging="Tape and Reel", Pins=2, Pricing="5000=0.00729, 10000=0.00633, 25000=0.00557, 50000=0.0051, 125000=0.005 (USD)", Reach SVHC Compliant=Yes, RoHS=Yes, RoHS Compliant=Yes, Supplier=Digi-Key, Technology="CARBON FILM", Terminal Finish=Tin, Termination=Wire
R15: library part CF14JT10K0120, "Fixed Resistor, Carbon Film, 0.25W, 10000ohm, 350V, 5% +/-Tol, -500,0ppm/Cel, Through Hole Mount", Manufacturer="Stackpole Electronics", Manufacturer Part Number=CF14JT10K0, Max Operating Temperature=155°C, Min Operating Temperature=-55°C, Package Diameter=2.3mm, Package Length=6mm, Package Shape=Tubular, Package Style=AxialMeter, Power=250mW, Rated Temperature=70°C, Resistor Type="FIXED RESISTOR", Supplier Part Number=CF14JT10K0TR-ND, Temperature Coefficient=500ppm/°C, Tolerance=5%, Working Voltage=350V, Category="Through-Hole Resistors", ComponentLink1Description=https://datasheet.ciiva.com:443/pdfs/VipMasterIC/IC/SEIE/SEIE-S-A0009883960/SEIE-S-A0009883960-1.pdf?src-supplier=IHS+Markit, ComponentLink1URL=https://datasheet.ciiva.com:443/pdfs/VipMasterIC/IC/SEIE/SEIE-S-A0009883960/SEIE-S-A0009883960-1.pdf?src-supplier=IHS+Markit, ComponentLink2Description=http://components.arrow.com/part/dataview/27619991S9848636N1174?src-supplier=Arrow+Electronics, ComponentLink2URL=http://components.arrow.com/part/dataview/27619991S9848636N1174?src-supplier=Arrow+Electronics, ComponentLink3Description=https://www.seielect.com/catalog/SEI-CF_CFM.pdf?src-supplier=Avnet, ComponentLink3URL=https://www.seielect.com/catalog/SEI-CF_CFM.pdf?src-supplier=Avnet, ComponentLink4Description=https://www.seielect.com/catalog/SEI-Packaging.pdf?src-supplier=Digi-Key, ComponentLink4URL=https://www.seielect.com/catalog/SEI-Packaging.pdf?src-supplier=Digi-Key, ComponentLink5Description=https://www.verical.com/server-webapp/html/getDatasheet?partID=367360&src-supplier=Verical, ComponentLink5URL=https://www.verical.com/server-webapp/html/getDatasheet?partID=367360&src-supplier=Verical, ComponentLink6Description=http://www.seielect.com/Catalog/SEI-CF_CFM.pdf?src-supplier=Future+Electronics, ComponentLink6URL=http://www.seielect.com/Catalog/SEI-CF_CFM.pdf?src-supplier=Future+Electronics, Construction=Tubular, JESD-609 Code=e3, Lead Diameter=0.55mm, Lead Length=28mm, Mounting Technology="Through Hole", Packaging="Tape and Reel", Pins=2, Pricing="5000=0.00729, 10000=0.00633, 25000=0.00557, 50000=0.0051, 125000=0.005 (USD)", Reach SVHC Compliant=Yes, RoHS=Yes, RoHS Compliant=Yes, Supplier=Digi-Key, Technology="CARBON FILM", Terminal Finish=Tin, Termination=Wire
sig: library part 2pinheader
U1: library part CMP-0017-00972-2, "Low-Noise JFET-Input General-Purpose Operational Amplifier, 7 to 36 V, 0 to 70 degC, 8-pin DIP (P8), Pb-Free (RoHS)", Manufacturer="Texas Instruments", Rating=Military, Total Supply Voltage(Max)(+5V is 5, +/-5V is 10)=36, Total Supply Voltage(Min)(+5V is 5, +/-5V is 10)=7, CMRR(Min)(dB)=70, Code_JEDEC=MS-001, ComponentLink1Description="Manufacturer URL", ComponentLink1URL=http://www.ti.com/, ComponentLink2Description=Datasheet, ComponentLink2URL=http://www.ti.com/lit/ds/symlink/tl071.pdf, ComponentLink3Description="Package Specification", ComponentLink3URL=http://www.ti.com/litv/pdf/mpdi001b, DatasheetVersion=SLOS080J, Eco-Plan="Pb-Free (RoHS)", GBW(Typ)(MHz)=3, IIB(Max)(pA)=200, Iq per channel(Max)(mA)=2.5, Mounting Technology="Through Hole", Number of Channels=1, Offset Drift(Typ)(uV/C)=18, PackageDescription="8-Pin Plastic In-Line, Body 9.59 x 6.35 mm, Pitch 2.54 mm", PackageReference=P0008A, PackageVersion="4040082/E, 04/2010", PartNumber=TL071CP, Slew Rate(Typ)(V/us)=13, Sub Family="General Purpose Amplifier, High Supply Voltage Amplifier (>=30V)", Vio (25C)(Max)(mV)=10, Vn at 1kHz(Typ)(nV/rtHz)=18
U2 U3 U4: library part CMP-0017-00950-2, "Dual Low-Noise JFET-Input General-Purpose Operational Amplifier, 7 to 36 V, 0 to 70 degC, 8-pin DIP (P8), Pb-Free (RoHS)", Manufacturer="Texas Instruments", Rating=Catalog, Total Supply Voltage(Max)(+5V is 5, +/-5V is 10)=36, Total Supply Voltage(Min)(+5V is 5, +/-5V is 10)=7, CMRR(Min)(dB)=70, Code_JEDEC=MS-001, ComponentLink1Description="Manufacturer URL", ComponentLink1URL=http://www.ti.com/, ComponentLink2Description=Datasheet, ComponentLink2URL=http://www.ti.com/lit/ds/symlink/tl072.pdf, ComponentLink3Description="Package Specification", ComponentLink3URL=http://www.ti.com/litv/pdf/mpdi001b, DatasheetVersion=SLOS080J, Eco-Plan="Pb-Free (RoHS)", GBW(Typ)(MHz)=3, IIB(Max)(pA)=200, Iq per channel(Max)(mA)=2.5, Mounting Technology="Through Hole", Number of Channels=2, Offset Drift(Typ)(uV/C)=18, PackageDescription="8-Pin Plastic In-Line, Body 9.59 x 6.35 mm, Pitch 2.54 mm", PackageReference=P0008A, PackageVersion="4040082/E, 04/2010", PartNumber=TL072CP, Slew Rate(Typ)(V/us)=13, Sub Family="General Purpose Amplifier, High Supply Voltage Amplifier (>=30V)", Vio (25C)(Max)(mV)=10, Vn at 1kHz(Typ)(nV/rtHz)=18

## Free pads (board coordinates)
  rect 67.91x67.91 / inner round 67.91 / far side rect 67.91x67.91 hole 133.86: 13(125.79,130) 13(136.79,2178) 13(2880.79,2167) 13(2884.79,140)

## Nets (pads, with @x,y where several pads share a name; then routed paths per layer and width w, separated by ;. In a path a pad name is that pad's centre, name@x,y a point inside that pad or via, vN(x,y) a via of type N, cw(c..) or ccw(c..) an arc to the next point about the centre after c; other vN are vias at no path point)
3V7: IC1.7 J?.1 U1.7 U2.8 U3.8 U4.8 | length 4136.5
  Top Layer w20: U2.8 471.85,1497.44 461.91,1507.38 461.91,1934.91 U1.7 ; U3.8 1760,1966.18 U4.8 1709.91,1203.91 1709.91,610.39 IC1.7 1694.94,482.64 J?.1
  Bottom Layer w20: U1.7 600.62,2012.38 1219.91,2012.38 1266.91,2059.38 1566.27,2059.38 U3.8
-3V7: IC1.4 J?.3 U1.4 U2.4 U3.4 U4.4 | length 4237.1
  Top Layer w20: U2.4 270,928.46 U1.4 ; U3.4 1409.91,1716.27 1409.91,1004.09 U4.4 1496.91,917.09 1496.91,397.21 IC1.4
  Bottom Layer w20: U1.4 371.62,1741.38 1248.27,1741.38 U3.4 ; IC1.4 1535.32,272.38 1789.89,272.38 J?.3
ADout: IC1.6 sig.1 | length 639.8
  Bottom Layer w20: sig.1 1319.88,284.35 1432.91,397.38 1709.68,397.38 IC1.6
gain1: J?.4 R1.2 | length 2029.8
  Bottom Layer w20: R1.2 693.91,937.11 693.91,705.38 794.91,604.38 1912.91,604.38 1994.94,522.35 J?.4
gain2: IC1.8 J?.5 R4.2 | length 2915.1
  Top Layer w20: R4.2 992.91,1115.95 992.91,203.5 1094.04,102.38 2030,102.38 J?.5 2094.94,325.36 IC1.8
GND: C5.N C6.P C7.P C10.N IC1.5 J?.2 R5.1 R15.1 R?.2@2968.21,311 U2.5
HPout: R2.2 R10.1 U1.2 U1.6 | length 1101.9
  Top Layer w20: R2.2 538.21,1501.08 491.91,1547.38 491.91,1864.91 U1.6
  Bottom Layer w20: U1.2 370,1943 U1.6 703.79,1809.21 R10.1
LA: IC1.3 J1.2 J1.3 | length 797.3
  Bottom Layer w20: J1.2 782.48,338.58 J1.3 833.66,338.38 1113.91,338.38 1229.54,454 IC1.3
LPout: C3.2 NI.1 U3.6 U3.7 | length 1451.4
  Top Layer w20: U3.6 U3.7
  Bottom Layer w20: U3.6 2098.91,1909.65 2113.27,1924 NI.1 2709.38,1924 C3.2
NetC1_N: C1.N C2.P R2.1 | length 1512.5
  Bottom Layer w20: R2.1 189.83,1415.38 793.33,1415.38 C2.P 874.33,1496.38 1397.91,1496.38 1449.76,1548.23 C1.N
NetC1_P: C1.P sig.2 | length 1352.6
  Top Layer w20: sig.2 1574.31,315.65 C1.P
NetC2_N: C2.N R5.2 U1.3 | length 1081.2
  Top Layer w20: R5.2 139.79,1812.79 U1.3
  Bottom Layer w20: R5.2 234.56,1548.23 C2.N
NetC3_1: C3.1 R7.2 R9.1 | length 1088.9
  Bottom Layer w20: R7.2 1939.91,2161.21 1942.34,2158.79 R9.1 2152.13,2040.65 C3.1
NetC4_2: C4.2 R6.2 R11.1 U2.6 | length 960.9
  Top Layer w20: R6.2 161.79,523.8 163.21,522.38 R11.1 257.38,325.83 C4.2
  Bottom Layer w20: R6.2 439.17,905.38 446.91,905.38 U2.6
NetC5_P: C5.P R9.2 U3.5 | length 1164.5
  Bottom Layer w20: C5.P 1190.58,1667 1473.89,1667 U3.5 1684.35,1809.65 1827,1667 1942.22,1667 R9.2
NetC6_N: C6.N C7.N NP1.3 NP2.1 | length 1459
  Top Layer w20: NP1.3 NP2.1
  Bottom Layer w20: C6.N C7.N 2161.17,1637.38 2651.01,1637.38 NP2.1
NetC8_N: C8.N NI.2 R13.1 | length 2149.5
  Top Layer w20: C8.N 1266.91,1606.78 1266.91,2161.38 1317.91,2212.38 2165.41,2212.38 R13.1 2553.79,1824 NI.2
NetC8_P: C8.P C9.N R16.1 | length 1709.9
  Top Layer w20: R16.1 2196.91,1082.43 2196.91,1424.28 C9.N
  Bottom Layer w20: C8.P 1410.34,1449.8 1459.91,1499.38 2272.01,1499.38 C9.N
NetC9_P: C9.P R12.2 U4.3 | length 1024.8
  Bottom Layer w20: U4.3 1510.38,1104.38 1936.66,1104.38 R12.2 2282.09,1449.8 C9.P
NetC10_P: C10.P C11.P R8.1 R8.2 R10.2 U3.3 | length 1382.7
  Top Layer w20: R8.2 896,1768.94 923.56,1741.38 1048.38,1741.38 1062.09,1755.09 1062.09,1792.31 C10.P 1063.68,1800.11 1063.68,2074.89 C11.P
  Bottom Layer w20: R10.2 820.91,2209.21 822.49,2210.79 R8.1 1028.79,2078 C11.P ; R8.2 994.86,1909.65 U3.3
NetC11_N: C11.N R7.1 U3.1 U3.2 | length 906
  Top Layer w20: U3.2 U3.1
  Bottom Layer w20: C11.N 1225.63,2078 1257.01,2109.38 1316.27,2109.38 U3.1 ; U3.2 1466.8,1859.38 1750.84,1859.38 R7.1
NetIC1_1: IC1.1 R1.1 R3.1 | length 599.5
  Top Layer w20: R3.1 R1.1 1313.91,810.78 1313.91,793.79 IC1.1
NetND_1: ND.1 R?.2@742,844 U4.1 | length 2159.2
  Bottom Layer w20: U4.1 1415.38,1209.38 1107.38,1209.38 742,844 817.62,768.38 1746.38,768.38 ND.1
NetND_2: ND.2 R14.2 | length 175
  Bottom Layer w20: ND.2 1996.91,835 2001.2,830.71 R14.2
NetNP1_2: NP1.2 R13.2 | length 977.5
  Top Layer w20: R13.2 2412.91,1564.88 2412.91,1223.38 2452.91,1183.38 2565.64,1183.38 NP1.2
NetNP2_2: NP2.2 R12.1 | length 323.5
  Top Layer w20: R12.1 2637.91,1405.63 2637.91,1424.33 NP2.2
NetNP3_1: NP3.1 R16.2 | length 770.1
  Top Layer w20: R16.2 2437.91,923.43 2437.91,801.38 2468.91,770.38 2615.48,770.38 NP3.1
NetNP3_2: NP3.2 R14.1 R15.2 | length 648.2
  Top Layer w20: R14.1 2537.91,882.4 2537.91,1061.12 R15.2
  Bottom Layer w20: R14.1 2486.22,801.22 NP3.2
NetR6_1: R6.1 U2.1 U2.2 | length 874.2
  Top Layer w20: U2.1 U2.2 121.91,980.38 121.91,779.38 273.29,628 R6.1
notch1: J?.6 J?.7 R?.1@1142,844 U4.2 | length 2157.8
  Bottom Layer w20: R?.1@1142,844 1172.91,844 1221,892.09 1221,915 1409.91,1103.91 ; U4.2 1409.91,1103.91 ; J?.7 J?.6 2194.94,816.35 2132.91,878.38 2080.91,878.38 1954.91,1004.38 1432.91,1004.38 1409.91,1027.38 1409.91,1103.91
notch2: J?.8 R?.1@2568.21,311 | length 232.8
  Top Layer w20: J?.8 2531.9,304.28 2561.49,304.28 R?.1@2568.21,311
RA: IC1.2 J1.4 J1.5 | length 685.7
  Top Layer w20: J1.4 1089.57,379.06 1109.25,359.38 J1.5
  Bottom Layer w20: J1.4 1419.39,519.68 IC1.2
RL: R3.2 R4.1 U2.3 | length 789
  Top Layer w20: R3.2 R4.1
  Bottom Layer w20: U2.3 221.91,980.38 597.24,980.38 R3.2
RLout: C4.1 J1.1 R11.2 U2.7 | length 1371.6
  Top Layer w20: U2.7 609.91,892.25 609.91,466.7 R11.2 563.21,285.94 552.65,275.38 C4.1
  Bottom Layer w20: C4.1 608.04,86.61 J1.1
pads on no net: NP1.1 NP2.3 NP3.3 U1.1 U1.5 U1.8 U4.5 U4.6 U4.7

## Polygon pours and split planes (outlines as drawn)
GND on Bottom Layer "GND_L02_P001" (solid, pour order 1): 50,2265.75 50,57.09 57.09,50 2990,50 2990,2265.75
GND on Top Layer "NONET_L01_P000" (solid, pour order 0): 48.23,2269.68 48.23,2253.94 48.23,50 2995.08,50 2995.08,2269.68

## Silkscreen, mask and mechanical layers (free items; w line width, h text height)
Top Overlay:
  drawing of 99 lines, arcs and shapes, not listed
  text "BioSense A.I. / Analog ECG" at 1937.71,381.5 h130
  text "." at 2874.57,350.55 h31.5
  text "gain" at 2015,84.07 h15.75
  text "notch" at 2325,81.77 h15.75
  text "GND" at 1784.04,74.88 h15.75
  text "-Vcc" at 1865,74.88 h15.75
  text "+Vcc" at 1665,73.9 h15.75
Mechanical 6:
  lines w20: 1,53.04 ccw(c59.04,53.04) 18,12 ccw(c46.97,40.97) 46.97,0 2994.13,0 ccw(c2994.13,64.87) 3040,19 ccw(c3013.44,45.56) 3051,45.56 3051,2256.09 ccw(c2993.94,2256.09) 3034.29,2296.44 ccw(c3006.37,2268.52) 3006.37,2308 47.39,2308 ccw(c47.38,2263.62) 16,2295 ccw(c52.21,2258.79) 1,2258.79 1,54 1,53.04

## Text inside footprints (layer, text, board x,y; h text height)
J?: Top Overlay "8" at 2382.74,234.25 h40; Top Overlay "1" at 1687.46,234.25 h40